# EAGLE board ATA_Wrappot_Fix_V1.0 (EAGLE 4.16)
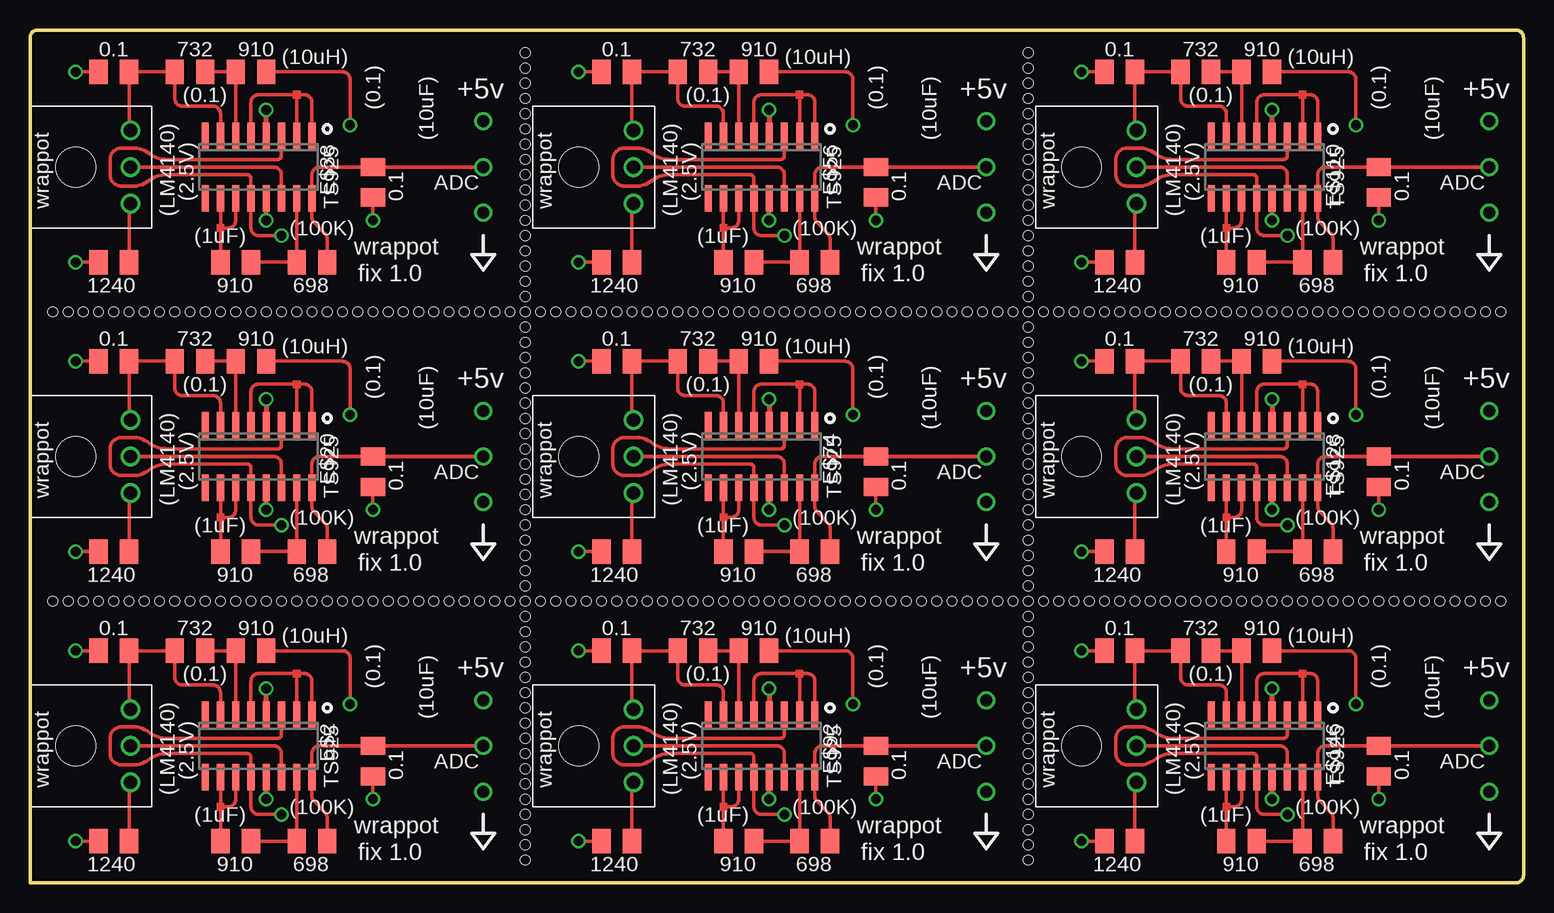
[diagram p0: board, top side]
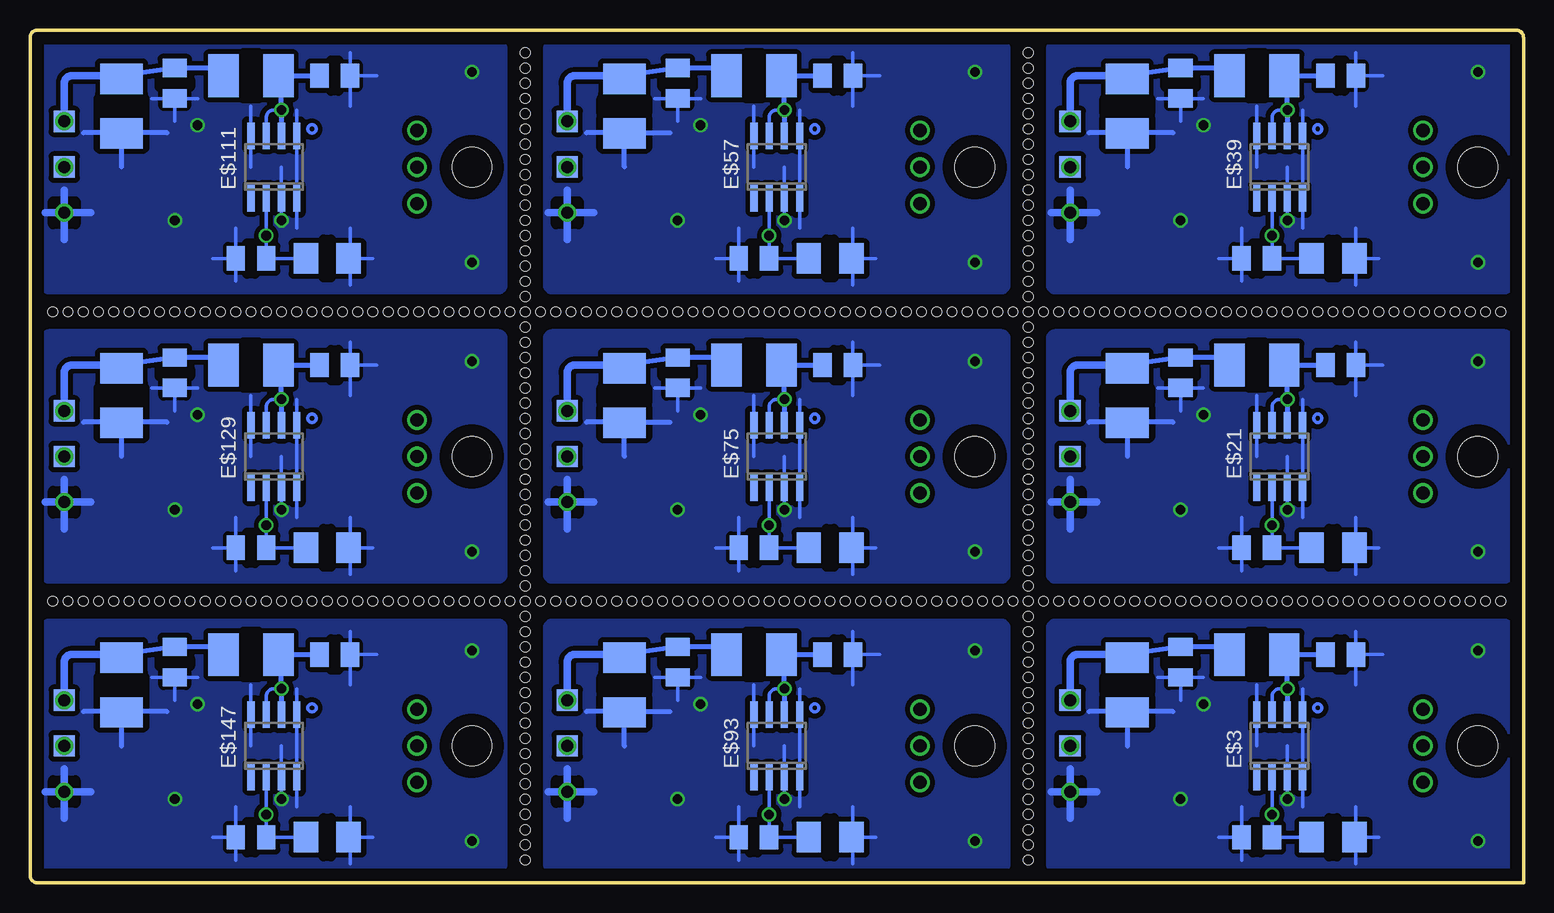
[diagram p1: board, bottom side, seen from below]

Size 124.46 x 71.12 mm. Coordinates in mm from the lower left corner, seen from the top.
Outline: 0,0 123.83,0 arc90 124.46,0.64 124.46,70.48 arc90 123.83,71.12 0.64,71.12 arc90 0,70.48 0,0
Copper layers (1+16): Top 0.035mm / dielectric 1.5mm / Bottom 0.035mm
Design rules "default": minimum track width 10mil, minimum drill 24mil, track to track 8mil, track to pad 8mil, pad to pad 8mil, via to via 8mil, smd to smd 8mil, copper to edge 40mil, drill to drill 8mil, minimum pad ring 10mil, minimum via ring 8mil, stop-mask expansion 4mil, vias tented up to drill 0mil, thermal gap 10mil
Holes 0.8 mm at 1.91,23.5 3.17,23.5 4.45,23.5 5.71,23.5 6.99,23.5 8.26,23.5 9.53,23.5 10.79,23.5 12.06,23.5 13.34,23.5 14.61,23.5 15.88,23.5 17.14,23.5 18.41,23.5 19.68,23.5 20.95,23.5 22.23,23.5 23.5,23.5 24.77,23.5 26.04,23.5 27.3,23.5 28.57,23.5 29.84,23.5 31.11,23.5 32.38,23.5 33.66,23.5 34.92,23.5 36.2,23.5 37.47,23.5 38.73,23.5 40.01,23.5 41.27,23.5 42.55,23.5 43.81,23.5 45.09,23.5 46.35,23.5 47.62,23.5 48.9,23.5 50.16,23.5 51.44,23.5 52.7,23.5 53.98,23.5 55.24,23.5 56.52,23.5 57.78,23.5 59.05,23.5 60.33,23.5 61.59,23.5 62.87,23.5 64.14,23.5 65.41,23.5 66.67,23.5 67.94,23.5 69.22,23.5 70.48,23.5 71.75,23.5 73.03,23.5 74.3,23.5 75.56,23.5 76.83,23.5 78.11,23.5 79.38,23.5 80.64,23.5 81.92,23.5 83.19,23.5 84.45,23.5 85.72,23.5 87,23.5 88.27,23.5 89.53,23.5 90.81,23.5 92.08,23.5 93.34,23.5 94.61,23.5 95.89,23.5 97.16,23.5 98.42,23.5 99.69,23.5 100.97,23.5 102.23,23.5 103.5,23.5 104.78,23.5 106.05,23.5 107.31,23.5 108.58,23.5 109.86,23.5 109.86,23.5 111.12,23.5 112.39,23.5 113.67,23.5 114.94,23.5 116.2,23.5 117.47,23.5 118.75,23.5 120.02,23.5 121.28,23.5 122.56,23.5 1.91,47.62 3.17,47.62 4.45,47.62 5.71,47.62 6.99,47.62 8.26,47.62 9.53,47.62 10.79,47.62 12.06,47.62 13.34,47.62 14.61,47.62 15.88,47.62 17.14,47.62 18.41,47.62 19.68,47.62 20.95,47.62 22.23,47.62 23.5,47.62 24.77,47.62 26.04,47.62 27.3,47.62 28.57,47.62 29.84,47.62 31.11,47.62 32.38,47.62 33.66,47.62 34.92,47.62 36.2,47.62 37.47,47.62 38.73,47.62 40.01,47.62 41.27,47.62 42.55,47.62 43.81,47.62 45.09,47.62 46.35,47.62 47.62,47.62 48.9,47.62 50.16,47.62 51.44,47.62 52.7,47.62 53.98,47.62 55.24,47.62 56.52,47.62 57.78,47.62 59.05,47.62 60.33,47.62 61.59,47.62 62.87,47.62 64.14,47.62 65.41,47.62 66.67,47.62 67.94,47.62 69.22,47.62 70.48,47.62 71.75,47.62 73.03,47.62 74.3,47.62 75.56,47.62 76.83,47.62 78.11,47.62 79.38,47.62 80.64,47.62 81.92,47.62 83.19,47.62 84.45,47.62 85.72,47.62 87,47.62 88.27,47.62 89.53,47.62 90.81,47.62 92.08,47.62 93.34,47.62 94.61,47.62 95.89,47.62 97.16,47.62 98.42,47.62 99.69,47.62 100.97,47.62 102.23,47.62 103.5,47.62 104.78,47.62 106.05,47.62 107.31,47.62 108.58,47.62 109.86,47.62 109.86,47.62 111.12,47.62 112.39,47.62 113.67,47.62 114.94,47.62 116.2,47.62 117.47,47.62 118.75,47.62 120.02,47.62 121.28,47.62 122.56,47.62 41.27,69.22 41.27,67.94 41.27,66.67 41.27,65.41 41.27,64.14 41.27,62.87 41.27,61.59 41.27,60.33 41.27,59.05 41.27,57.78 41.27,56.52 41.27,55.24 41.27,53.98 41.27,52.7 41.27,51.44 41.27,50.16 41.27,48.9 41.27,46.35 41.27,45.09 41.27,43.81 41.27,42.55 41.27,41.27 41.27,40.01 41.27,38.73 41.27,37.47 41.27,36.2 41.27,34.92 41.27,33.66 41.27,32.38 41.27,31.11 41.27,29.84 41.27,28.57 41.27,27.3 41.27,26.04 41.27,24.77 41.27,22.23 41.27,20.95 41.27,19.68 41.27,18.41 41.27,17.14 41.27,15.88 41.27,14.61 41.27,13.34 41.27,12.06 41.27,10.79 41.27,9.53 41.27,8.26 41.27,6.99 41.27,5.71 41.27,4.45 41.27,3.17 41.27,1.91 83.19,69.22 83.19,67.94 83.19,66.67 83.19,65.41 83.19,64.14 83.19,62.87 83.19,61.59 83.19,60.33 83.19,59.05 83.19,57.78 83.19,56.52 83.19,55.24 83.19,53.98 83.19,52.7 83.19,51.44 83.19,50.16 83.19,48.9 83.19,46.35 83.19,45.09 83.19,43.81 83.19,42.55 83.19,41.27 83.19,40.01 83.19,38.73 83.19,37.47 83.19,36.2 83.19,34.92 83.19,33.66 83.19,32.38 83.19,31.11 83.19,29.84 83.19,28.57 83.19,27.3 83.19,26.04 83.19,24.77 83.19,22.23 83.19,20.95 83.19,19.68 83.19,18.41 83.19,17.14 83.19,15.88 83.19,14.61 83.19,13.34 83.19,12.06 83.19,10.79 83.19,9.53 83.19,8.26 83.19,6.99 83.19,5.71 83.19,4.45 83.19,3.17 83.19,1.91
bRestrict: area 36.8,6.7 to 38.7,8.6; area 18.1,13 to 18.7,15.2; area 21.9,13 to 22.5,15.2; area 18.1,7.6 to 18.7,9.8; area 31.1,13 to 34.9,15.6; area 27.6,16.5 to 29.5,17.8; area 13.3,18.1 to 14.6,20; area 22.9,2.9 to 24.1,4.8; area 13,2.5 to 15.2,5.1; area 14.9,17.8 to 15.6,20.3; area 21.6,17.1 to 22.9,21; area 27.3,18.1 to 29.8,18.7; 123 more areas

## Footprints (pad centres in the part's own frame; a part is rotated, then mirrored left to right if it is on the bottom)
MICROFIT1X3PIN = drill 1.1 round: P$1 0,4.572; P$2 -3.048,4.572; P$3 3.048,4.572 | hole 3.302: 0,0
SO16 = smd 0.6 x 2.2: 1 -4.445,-2.6; 2 -3.175,-2.6; 3 -1.905,-2.6; 4 -0.635,-2.6; 5 0.635,-2.6; 6 1.905,-2.6; 7 3.175,-2.6; 8 4.445,-2.6; 9 4.445,2.6; 10 3.175,2.6; 11 1.905,2.6; 12 0.635,2.6; 13 -0.635,2.6; 14 -1.905,2.6; 15 -3.175,2.6; 16 -4.445,2.6
SO8 = smd 0.6 x 2.2: 1 -1.905,-2.6; 2 -0.635,-2.6; 3 0.635,-2.6; 4 1.905,-2.6; 5 1.905,2.6; 6 0.635,2.6; 7 -0.635,2.6; 8 -1.905,2.6
BYPASSPAD = smd 1.778 x 1.778: P$2 0,0
SMD0805 = smd 2.032 x 1.524: P$1 0,1.27; P$2 0,-1.27
CERAMIC10UFSMD = smd 2.032 x 2.54: P$1 1.778,0; P$2 -1.778,0
CAP10UFMIN = smd 2.54 x 3.556: P$1 -2.286,0; P$2 2.286,0

## Placement (x,y rotation side)
E$1  [MICROFIT1X3PIN]  3.81,11.43 270 top
E$2  [SO16]  19.05,11.43 180 top
E$3  [SO8]  20.32,11.43 0 bottom
E$4  [BYPASSPAD]  37.78,15.24 90 bottom
E$5  [SMD0805]  22.23,3.81 90 bottom
E$6  [SMD0805]  6.99,19.37 270 top
E$7  [SMD0805]  6.99,3.49 270 top
E$8  [CERAMIC10UFSMD]  15.88,3.81 0 bottom
E$9  [CAP10UFMIN]  33.02,16.51 90 bottom
E$10  [SMD0805]  18.41,19.37 90 top
E$11  [SMD0805]  13.34,19.37 90 top
E$12  [SMD0805]  23.5,3.49 90 top
E$13  [SMD0805]  17.14,3.49 90 top
E$14  [CAP10UFMIN]  22.23,19.05 180 bottom
E$15  [SMD0805]  15.24,19.05 90 bottom
E$16  [SMD0805]  28.57,18.41 180 bottom
E$17  [SMD0805]  28.57,10.16 0 top
E$18  [BYPASSPAD]  37.78,11.43 90 bottom
E$19  [MICROFIT1X3PIN]  3.81,35.56 270 top
E$20  [SO16]  19.05,35.56 180 top
E$21  [SO8]  20.32,35.56 0 bottom
E$22  [SMD0805]  22.23,27.94 90 bottom
E$23  [CERAMIC10UFSMD]  15.88,27.94 0 bottom
E$24  [CAP10UFMIN]  33.02,40.64 90 bottom
E$25  [SMD0805]  6.99,43.5 270 top
E$26  [SMD0805]  6.99,27.62 270 top
E$27  [SMD0805]  18.41,43.5 90 top
E$28  [SMD0805]  13.34,43.5 90 top
E$29  [SMD0805]  23.5,27.62 90 top
E$30  [SMD0805]  17.14,27.62 90 top
E$31  [CAP10UFMIN]  22.23,43.18 180 bottom
E$32  [SMD0805]  15.24,43.18 90 bottom
E$33  [SMD0805]  28.57,42.55 180 bottom
E$34  [SMD0805]  28.57,34.29 0 top
E$35  [BYPASSPAD]  37.78,39.37 90 bottom
E$36  [BYPASSPAD]  37.78,35.56 90 bottom
E$37  [MICROFIT1X3PIN]  3.81,59.69 270 top
E$38  [SO16]  19.05,59.69 180 top
E$39  [SO8]  20.32,59.69 0 bottom
E$40  [SMD0805]  22.23,52.07 90 bottom
E$41  [CERAMIC10UFSMD]  15.88,52.07 0 bottom
E$42  [CAP10UFMIN]  33.02,64.77 90 bottom
E$43  [SMD0805]  6.99,67.63 270 top
E$44  [SMD0805]  6.99,51.75 270 top
E$45  [SMD0805]  18.41,67.63 90 top
E$46  [SMD0805]  13.34,67.63 90 top
E$47  [SMD0805]  23.5,51.75 90 top
E$48  [SMD0805]  17.14,51.75 90 top
E$49  [CAP10UFMIN]  22.23,67.31 180 bottom
E$50  [SMD0805]  15.24,67.31 90 bottom
E$51  [SMD0805]  28.57,66.67 180 bottom
E$52  [SMD0805]  28.57,58.42 0 top
E$53  [BYPASSPAD]  37.78,63.5 90 bottom
E$54  [BYPASSPAD]  37.78,59.69 90 bottom
E$55  [MICROFIT1X3PIN]  45.72,59.69 270 top
E$56  [SO16]  60.96,59.69 180 top
E$57  [SO8]  62.23,59.69 0 bottom
E$58  [SMD0805]  64.14,52.07 90 bottom
E$59  [CERAMIC10UFSMD]  57.78,52.07 0 bottom
E$60  [CAP10UFMIN]  74.93,64.77 90 bottom
E$61  [SMD0805]  48.9,67.63 270 top
E$62  [SMD0805]  48.9,51.75 270 top
E$63  [SMD0805]  60.33,67.63 90 top
E$64  [SMD0805]  55.24,67.63 90 top
E$65  [SMD0805]  65.41,51.75 90 top
E$66  [SMD0805]  59.05,51.75 90 top
E$67  [CAP10UFMIN]  64.14,67.31 180 bottom
E$68  [SMD0805]  57.15,67.31 90 bottom
E$69  [SMD0805]  70.48,66.67 180 bottom
E$70  [SMD0805]  70.48,58.42 0 top
E$71  [BYPASSPAD]  79.69,63.5 90 bottom
E$72  [BYPASSPAD]  79.69,59.69 90 bottom
E$73  [MICROFIT1X3PIN]  45.72,35.56 270 top
E$74  [SO16]  60.96,35.56 180 top
E$75  [SO8]  62.23,35.56 0 bottom
E$76  [SMD0805]  64.14,27.94 90 bottom
E$77  [CERAMIC10UFSMD]  57.78,27.94 0 bottom
E$78  [CAP10UFMIN]  74.93,40.64 90 bottom
E$79  [SMD0805]  48.9,43.5 270 top
E$80  [SMD0805]  48.9,27.62 270 top
E$81  [SMD0805]  60.33,43.5 90 top
E$82  [SMD0805]  55.24,43.5 90 top
E$83  [SMD0805]  65.41,27.62 90 top
E$84  [SMD0805]  59.05,27.62 90 top
E$85  [CAP10UFMIN]  64.14,43.18 180 bottom
E$86  [SMD0805]  57.15,43.18 90 bottom
E$87  [SMD0805]  70.48,42.55 180 bottom
E$88  [SMD0805]  70.48,34.29 0 top
E$89  [BYPASSPAD]  79.69,39.37 90 bottom
E$90  [BYPASSPAD]  79.69,35.56 90 bottom
E$91  [MICROFIT1X3PIN]  45.72,11.43 270 top
E$92  [SO16]  60.96,11.43 180 top
E$93  [SO8]  62.23,11.43 0 bottom
E$94  [SMD0805]  64.14,3.81 90 bottom
E$95  [CERAMIC10UFSMD]  57.78,3.81 0 bottom
E$96  [CAP10UFMIN]  74.93,16.51 90 bottom
E$97  [SMD0805]  48.9,19.37 270 top
E$98  [SMD0805]  48.9,3.49 270 top
E$99  [SMD0805]  60.33,19.37 90 top
E$100  [SMD0805]  55.24,19.37 90 top
E$101  [SMD0805]  65.41,3.49 90 top
E$102  [SMD0805]  59.05,3.49 90 top
E$103  [CAP10UFMIN]  64.14,19.05 180 bottom
E$104  [SMD0805]  57.15,19.05 90 bottom
E$105  [SMD0805]  70.48,18.41 180 bottom
E$106  [SMD0805]  70.48,10.16 0 top
E$107  [BYPASSPAD]  79.69,15.24 90 bottom
E$108  [BYPASSPAD]  79.69,11.43 90 bottom
E$109  [MICROFIT1X3PIN]  87.63,59.69 270 top
E$110  [SO16]  102.87,59.69 180 top
E$111  [SO8]  104.14,59.69 0 bottom
E$112  [SMD0805]  106.05,52.07 90 bottom
E$113  [CERAMIC10UFSMD]  99.69,52.07 0 bottom
E$114  [CAP10UFMIN]  116.84,64.77 90 bottom
E$115  [SMD0805]  90.81,67.63 270 top
E$116  [SMD0805]  90.81,51.75 270 top
E$117  [SMD0805]  102.23,67.63 90 top
E$118  [SMD0805]  97.16,67.63 90 top
E$119  [SMD0805]  107.31,51.75 90 top
E$120  [SMD0805]  100.97,51.75 90 top
E$121  [CAP10UFMIN]  106.05,67.31 180 bottom
E$122  [SMD0805]  99.06,67.31 90 bottom
E$123  [SMD0805]  112.39,66.67 180 bottom
E$124  [SMD0805]  112.39,58.42 0 top
E$125  [BYPASSPAD]  121.6,63.5 90 bottom
E$126  [BYPASSPAD]  121.6,59.69 90 bottom
E$127  [MICROFIT1X3PIN]  87.63,35.56 270 top
E$128  [SO16]  102.87,35.56 180 top
E$129  [SO8]  104.14,35.56 0 bottom
E$130  [SMD0805]  106.05,27.94 90 bottom
E$131  [CERAMIC10UFSMD]  99.69,27.94 0 bottom
E$132  [CAP10UFMIN]  116.84,40.64 90 bottom
E$133  [SMD0805]  90.81,43.5 270 top
E$134  [SMD0805]  90.81,27.62 270 top
E$135  [SMD0805]  102.23,43.5 90 top
E$136  [SMD0805]  97.16,43.5 90 top
E$137  [SMD0805]  107.31,27.62 90 top
E$138  [SMD0805]  100.97,27.62 90 top
E$139  [CAP10UFMIN]  106.05,43.18 180 bottom
E$140  [SMD0805]  99.06,43.18 90 bottom
E$141  [SMD0805]  112.39,42.55 180 bottom
E$142  [SMD0805]  112.39,34.29 0 top
E$143  [BYPASSPAD]  121.6,39.37 90 bottom
E$144  [BYPASSPAD]  121.6,35.56 90 bottom
E$145  [MICROFIT1X3PIN]  87.63,11.43 270 top
E$146  [SO16]  102.87,11.43 180 top
E$147  [SO8]  104.14,11.43 0 bottom
E$148  [SMD0805]  106.05,3.81 90 bottom
E$149  [CERAMIC10UFSMD]  99.69,3.81 0 bottom
E$150  [CAP10UFMIN]  116.84,16.51 90 bottom
E$151  [SMD0805]  90.81,19.37 270 top
E$152  [SMD0805]  90.81,3.49 270 top
E$153  [SMD0805]  102.23,19.37 90 top
E$154  [SMD0805]  97.16,19.37 90 top
E$155  [SMD0805]  107.31,3.49 90 top
E$156  [SMD0805]  100.97,3.49 90 top
E$157  [CAP10UFMIN]  106.05,19.05 180 bottom
E$158  [SMD0805]  99.06,19.05 90 bottom
E$159  [SMD0805]  112.39,18.41 180 bottom
E$160  [SMD0805]  112.39,10.16 0 top
E$161  [BYPASSPAD]  121.6,15.24 90 bottom
E$162  [BYPASSPAD]  121.6,11.43 90 bottom

## Library data of the parts
E$1 E$4-E$19 E$22-E$37 E$40-E$55 E$58-E$73 E$76-E$91 E$94-E$109 E$112-E$127 E$130-E$145 E$148-E$162 = rfa
E$2 E$3 E$20 E$21 E$38 E$39 E$56 E$57 E$74 E$75 E$92 E$93 E$110 E$111 E$128 E$129 E$146 E$147 = ref-packages

## Nets
GND: E$5.P$1 E$6.P$2 E$7.P$2 E$10.P$2 E$15.P$2 E$16.P$1 E$17.P$2
GND1: E$22.P$1 E$25.P$2 E$26.P$2 E$27.P$2 E$32.P$2 E$33.P$1 E$34.P$2
GND2: E$40.P$1 E$43.P$2 E$44.P$2 E$45.P$2 E$50.P$2 E$51.P$1 E$52.P$2
GND3: E$58.P$1 E$61.P$2 E$62.P$2 E$63.P$2 E$68.P$2 E$69.P$1 E$70.P$2
GND4: E$76.P$1 E$79.P$2 E$80.P$2 E$81.P$2 E$86.P$2 E$87.P$1 E$88.P$2
GND5: E$94.P$1 E$97.P$2 E$98.P$2 E$99.P$2 E$104.P$2 E$105.P$1 E$106.P$2
GND6: E$112.P$1 E$115.P$2 E$116.P$2 E$117.P$2 E$122.P$2 E$123.P$1 E$124.P$2
GND7: E$130.P$1 E$133.P$2 E$134.P$2 E$135.P$2 E$140.P$2 E$141.P$1 E$142.P$2
GND8: E$148.P$1 E$151.P$2 E$152.P$2 E$153.P$2 E$158.P$2 E$159.P$1 E$160.P$2
S$1: E$12.P$2 E$17.P$1
S$2: E$16.P$2
S$3: E$29.P$2 E$34.P$1
S$4: E$12.P$1 E$13.P$2
S$6: E$7.P$1
S$7: E$13.P$1
S$8: E$5.P$2
S$9: E$15.P$1
S$11: E$10.P$1 E$11.P$2
S$12: E$6.P$1 E$11.P$1
S$13: E$33.P$2
S$14: E$29.P$1 E$30.P$2
S$16: E$26.P$1
S$17: E$22.P$2
S$18: E$30.P$1
S$19: E$27.P$1 E$28.P$2
S$20: E$25.P$1 E$28.P$1
S$21: E$32.P$1
S$23: E$47.P$2 E$52.P$1
S$24: E$51.P$2
S$25: E$47.P$1 E$48.P$2
S$27: E$44.P$1
S$28: E$40.P$2
S$29: E$48.P$1
S$30: E$45.P$1 E$46.P$2
S$31: E$43.P$1 E$46.P$1
S$32: E$50.P$1
S$34: E$65.P$2 E$70.P$1
S$35: E$69.P$2
S$36: E$65.P$1 E$66.P$2
S$38: E$62.P$1
S$39: E$58.P$2
S$40: E$66.P$1
S$41: E$63.P$1 E$64.P$2
S$42: E$61.P$1 E$64.P$1
S$43: E$68.P$1
S$45: E$83.P$2 E$88.P$1
S$46: E$87.P$2
S$47: E$83.P$1 E$84.P$2
S$49: E$80.P$1
S$50: E$76.P$2
S$51: E$84.P$1
S$52: E$81.P$1 E$82.P$2
S$53: E$79.P$1 E$82.P$1
S$54: E$86.P$1
S$56: E$101.P$2 E$106.P$1
S$57: E$105.P$2
S$58: E$101.P$1 E$102.P$2
S$60: E$98.P$1
S$61: E$94.P$2
S$62: E$102.P$1
S$63: E$99.P$1 E$100.P$2
S$64: E$97.P$1 E$100.P$1
S$65: E$104.P$1
S$67: E$119.P$2 E$124.P$1
S$68: E$123.P$2
S$69: E$119.P$1 E$120.P$2
S$71: E$116.P$1
S$72: E$112.P$2
S$73: E$120.P$1
S$74: E$117.P$1 E$118.P$2
S$75: E$115.P$1 E$118.P$1
S$76: E$122.P$1
S$78: E$137.P$2 E$142.P$1
S$79: E$141.P$2
S$80: E$137.P$1 E$138.P$2
S$82: E$134.P$1
S$83: E$130.P$2
S$84: E$138.P$1
S$85: E$135.P$1 E$136.P$2
S$86: E$133.P$1 E$136.P$1
S$87: E$140.P$1
S$89: E$155.P$2 E$160.P$1
S$90: E$159.P$2
S$91: E$155.P$1 E$156.P$2
S$93: E$152.P$1
S$94: E$148.P$2
S$95: E$156.P$1
S$96: E$153.P$1 E$154.P$2
S$97: E$151.P$1 E$154.P$1
S$98: E$158.P$1

## Tracks (layer width: path | path; a pad name or v marks a point on that pad's centre or on a via)
GND  (via drill 0.8, 1)
  Top 0.305: v28.57,6.99 E$17.P$2 | v3.81,19.37 E$6.P$2 | v3.81,3.49 E$7.P$2 | E$10.P$2 26.04,19.37 arc-90 26.67,18.73 v26.67,14.92
  Top 0.406: v19.68,6.99 19.68,8.89
  Bottom 0.305: 22.23,11.43 22.23,16.51 | 18.41,6.35 18.41,16.19 | v19.68,6.99 19.68,11.43 | E$15.P$2 13.97,20.95 | E$15.P$2 11.75,19.05 | 13.97,16.51 E$15.P$2 | 26.67,17.14 E$16.P$1 | E$16.P$1 30.48,17.14 | E$16.P$1 28.57,15.24 | 13.97,3.81 13.97,6.35 | 13.97,3.81 12.06,3.81 | 13.97,1.59 13.97,3.81 | E$5.P$1 23.5,6.35 | E$5.P$1 25.4,3.81 | 23.5,1.91 E$5.P$1
  Bottom 0.406: 29.21,14.29 33.02,14.29 | 33.02,14.29 33.02,11.43 | 33.02,14.29 36.2,14.29
  Bottom 0.61: v37.78,7.62 35.56,7.62 | 37.78,5.4 v37.78,7.62 | v37.78,7.62 37.78,9.53 | v37.78,7.62 39.37,7.62
  pour Bottom (isolate 0.406): 0.95,1.59 0.95,21.27 arc-90 1.59,21.91 39.05,21.91 arc-90 39.69,21.27 39.69,1.59 arc-90 39.05,0.95 1.59,0.95 arc-90
GND1  (via drill 0.8, 1)
  Top 0.305: v28.57,31.11 E$34.P$2 | v3.81,43.5 E$25.P$2 | v3.81,27.62 E$26.P$2 | E$27.P$2 26.04,43.5 arc-90 26.67,42.86 v26.67,39.05
  Top 0.406: v19.68,31.11 19.68,33.02
  Bottom 0.305: 22.23,35.56 22.23,40.64 | 18.41,30.48 18.41,40.32 | v19.68,31.11 19.68,35.56 | E$32.P$2 13.97,45.09 | E$32.P$2 11.75,43.18 | 13.97,40.64 E$32.P$2 | E$33.P$1 26.67,41.27 | E$33.P$1 30.48,41.27 | 28.57,39.37 E$33.P$1 | 13.97,27.94 13.97,30.48 | 13.97,27.94 12.06,27.94 | 13.97,25.72 13.97,27.94 | E$22.P$1 23.5,30.48 | E$22.P$1 25.4,27.94 | 23.5,26.04 E$22.P$1
  Bottom 0.406: 29.21,38.42 33.02,38.42 | 33.02,38.42 33.02,35.56 | 33.02,38.42 36.2,38.42
  Bottom 0.61: v37.78,31.75 35.56,31.75 | 37.78,29.53 v37.78,31.75 | v37.78,31.75 37.78,33.66 | v37.78,31.75 39.37,31.75
  pour Bottom (isolate 0.406): 0.95,25.72 0.95,45.4 arc-90 1.59,46.04 39.05,46.04 arc-90 39.69,45.4 39.69,25.72 arc-90 39.05,25.08 1.59,25.08 arc-90
GND2  (via drill 0.8, 1)
  Top 0.305: v28.57,55.24 E$52.P$2 | v3.81,67.63 E$43.P$2 | v3.81,51.75 E$44.P$2 | E$45.P$2 26.04,67.63 arc-90 26.67,66.99 v26.67,63.18
  Top 0.406: v19.68,55.24 19.68,57.15
  Bottom 0.305: 22.23,59.69 22.23,64.77 | 18.41,54.61 18.41,64.45 | v19.68,55.24 19.68,59.69 | E$50.P$2 13.97,69.22 | E$50.P$2 11.75,67.31 | 13.97,64.77 E$50.P$2 | 26.67,65.41 E$51.P$1 | E$51.P$1 30.48,65.41 | E$51.P$1 28.57,63.5 | 13.97,52.07 13.97,54.61 | 13.97,52.07 12.06,52.07 | 13.97,49.85 13.97,52.07 | E$40.P$1 23.5,54.61 | E$40.P$1 25.4,52.07 | 23.5,50.16 E$40.P$1
  Bottom 0.406: 29.21,62.55 33.02,62.55 | 33.02,62.55 33.02,59.69 | 33.02,62.55 36.2,62.55
  Bottom 0.61: v37.78,55.88 35.56,55.88 | 37.78,53.66 v37.78,55.88 | v37.78,55.88 37.78,57.78 | v37.78,55.88 39.37,55.88
  pour Bottom (isolate 0.406): 0.95,49.85 0.95,69.53 arc-90 1.59,70.17 39.05,70.17 arc-90 39.69,69.53 39.69,49.85 arc-90 39.05,49.21 1.59,49.21 arc-90
GND3  (via drill 0.8, 1)
  Top 0.305: v70.48,55.24 E$70.P$2 | E$61.P$2 v45.72,67.63 | E$62.P$2 v45.72,51.75 | E$63.P$2 67.94,67.63 arc-90 68.58,66.99 v68.58,63.18
  Top 0.406: v61.59,55.24 61.59,57.15
  Bottom 0.305: 64.14,59.69 64.14,64.77 | 60.33,54.61 60.33,64.45 | v61.59,55.24 61.59,59.69 | E$68.P$2 55.88,69.22 | E$68.P$2 53.66,67.31 | 55.88,64.77 E$68.P$2 | E$69.P$1 68.58,65.41 | E$69.P$1 72.39,65.41 | E$69.P$1 70.48,63.5 | 55.88,52.07 55.88,54.61 | 55.88,52.07 53.98,52.07 | 55.88,49.85 55.88,52.07 | E$58.P$1 65.41,54.61 | E$58.P$1 67.31,52.07 | 65.41,50.16 E$58.P$1
  Bottom 0.406: 74.93,62.55 71.12,62.55 | 74.93,59.69 74.93,62.55 | 74.93,62.55 78.11,62.55
  Bottom 0.61: v79.69,55.88 77.47,55.88 | 79.69,53.66 v79.69,55.88 | v79.69,55.88 79.69,57.78 | v79.69,55.88 81.28,55.88
  pour Bottom (isolate 0.406): 42.86,49.85 42.86,69.53 arc-90 43.5,70.17 80.96,70.17 arc-90 81.6,69.53 81.6,49.85 arc-90 80.96,49.21 43.5,49.21 arc-90
GND4  (via drill 0.8, 1)
  Top 0.305: v70.48,31.11 E$88.P$2 | E$79.P$2 v45.72,43.5 | E$80.P$2 v45.72,27.62 | E$81.P$2 67.94,43.5 arc-90 68.58,42.86 v68.58,39.05
  Top 0.406: v61.59,31.11 61.59,33.02
  Bottom 0.305: 64.14,35.56 64.14,40.64 | 60.33,30.48 60.33,40.32 | v61.59,31.11 61.59,35.56 | E$86.P$2 55.88,45.09 | E$86.P$2 53.66,43.18 | 55.88,40.64 E$86.P$2 | E$87.P$1 68.58,41.27 | E$87.P$1 72.39,41.27 | 70.48,39.37 E$87.P$1 | 55.88,27.94 55.88,30.48 | 55.88,27.94 53.98,27.94 | 55.88,25.72 55.88,27.94 | E$76.P$1 65.41,30.48 | E$76.P$1 67.31,27.94 | 65.41,26.04 E$76.P$1
  Bottom 0.406: 74.93,38.42 71.12,38.42 | 74.93,35.56 74.93,38.42 | 74.93,38.42 78.11,38.42
  Bottom 0.61: v79.69,31.75 77.47,31.75 | 79.69,29.53 v79.69,31.75 | v79.69,31.75 79.69,33.66 | v79.69,31.75 81.28,31.75
  pour Bottom (isolate 0.406): 42.86,25.72 42.86,45.4 arc-90 43.5,46.04 80.96,46.04 arc-90 81.6,45.4 81.6,25.72 arc-90 80.96,25.08 43.5,25.08 arc-90
GND5  (via drill 0.8, 1)
  Top 0.305: v70.48,6.99 E$106.P$2 | E$97.P$2 v45.72,19.37 | E$98.P$2 v45.72,3.49 | E$99.P$2 67.94,19.37 arc-90 68.58,18.73 v68.58,14.92
  Top 0.406: v61.59,6.99 61.59,8.89
  Bottom 0.305: 64.14,11.43 64.14,16.51 | 60.33,6.35 60.33,16.19 | v61.59,6.99 61.59,11.43 | E$104.P$2 55.88,20.95 | E$104.P$2 53.66,19.05 | 55.88,16.51 E$104.P$2 | E$105.P$1 68.58,17.14 | E$105.P$1 72.39,17.14 | E$105.P$1 70.48,15.24 | 55.88,3.81 55.88,6.35 | 55.88,3.81 53.98,3.81 | 55.88,1.59 55.88,3.81 | E$94.P$1 65.41,6.35 | E$94.P$1 67.31,3.81 | 65.41,1.91 E$94.P$1
  Bottom 0.406: 74.93,14.29 71.12,14.29 | 74.93,11.43 74.93,14.29 | 74.93,14.29 78.11,14.29
  Bottom 0.61: v79.69,7.62 77.47,7.62 | 79.69,5.4 v79.69,7.62 | v79.69,7.62 79.69,9.53 | v79.69,7.62 81.28,7.62
  pour Bottom (isolate 0.406): 42.86,1.59 42.86,21.27 arc-90 43.5,21.91 80.96,21.91 arc-90 81.6,21.27 81.6,1.59 arc-90 80.96,0.95 43.5,0.95 arc-90
GND6  (via drill 0.8, 1)
  Top 0.305: v112.39,55.24 E$124.P$2 | v87.63,67.63 E$115.P$2 | v87.63,51.75 E$116.P$2 | E$117.P$2 109.86,67.63 arc-90 110.49,66.99 v110.49,63.18
  Top 0.406: v103.5,55.24 103.5,57.15
  Bottom 0.305: 106.05,59.69 106.05,64.77 | 102.23,54.61 102.23,64.45 | v103.5,55.24 103.5,59.69 | E$122.P$2 97.79,69.22 | E$122.P$2 95.57,67.31 | 97.79,64.77 E$122.P$2 | 110.49,65.41 E$123.P$1 | E$123.P$1 114.3,65.41 | E$123.P$1 112.39,63.5 | 97.79,52.07 97.79,54.61 | 97.79,52.07 95.89,52.07 | 97.79,49.85 97.79,52.07 | E$112.P$1 107.31,54.61 | E$112.P$1 109.22,52.07 | 107.31,50.16 E$112.P$1
  Bottom 0.406: 113.03,62.55 116.84,62.55 | 116.84,62.55 116.84,59.69 | 116.84,62.55 120.02,62.55
  Bottom 0.61: v121.6,55.88 119.38,55.88 | 121.6,53.66 v121.6,55.88 | v121.6,55.88 121.6,57.78 | v121.6,55.88 123.19,55.88
  pour Bottom (isolate 0.406): 84.77,49.85 84.77,69.53 arc-90 85.41,70.17 122.87,70.17 arc-90 123.51,69.53 123.51,49.85 arc-90 122.87,49.21 85.41,49.21 arc-90
GND7  (via drill 0.8, 1)
  Top 0.305: v112.39,31.11 E$142.P$2 | v87.63,43.5 E$133.P$2 | v87.63,27.62 E$134.P$2 | E$135.P$2 109.86,43.5 arc-90 110.49,42.86 v110.49,39.05
  Top 0.406: v103.5,31.11 103.5,33.02
  Bottom 0.305: 106.05,35.56 106.05,40.64 | 102.23,30.48 102.23,40.32 | v103.5,31.11 103.5,35.56 | E$140.P$2 97.79,45.09 | E$140.P$2 95.57,43.18 | 97.79,40.64 E$140.P$2 | E$141.P$1 110.49,41.27 | E$141.P$1 114.3,41.27 | 112.39,39.37 E$141.P$1 | 97.79,27.94 97.79,30.48 | 97.79,27.94 95.89,27.94 | 97.79,25.72 97.79,27.94 | E$130.P$1 107.31,30.48 | E$130.P$1 109.22,27.94 | 107.31,26.04 E$130.P$1
  Bottom 0.406: 113.03,38.42 116.84,38.42 | 116.84,38.42 116.84,35.56 | 116.84,38.42 120.02,38.42
  Bottom 0.61: v121.6,31.75 119.38,31.75 | 121.6,29.53 v121.6,31.75 | v121.6,31.75 121.6,33.66 | v121.6,31.75 123.19,31.75
  pour Bottom (isolate 0.406): 84.77,25.72 84.77,45.4 arc-90 85.41,46.04 122.87,46.04 arc-90 123.51,45.4 123.51,25.72 arc-90 122.87,25.08 85.41,25.08 arc-90
GND8  (via drill 0.8, 1)
  Top 0.305: v112.39,6.99 E$160.P$2 | v87.63,19.37 E$151.P$2 | v87.63,3.49 E$152.P$2 | E$153.P$2 109.86,19.37 arc-90 110.49,18.73 v110.49,14.92
  Top 0.406: v103.5,6.99 103.5,8.89
  Bottom 0.305: 106.05,11.43 106.05,16.51 | 102.23,6.35 102.23,16.19 | v103.5,6.99 103.5,11.43 | E$158.P$2 97.79,20.95 | E$158.P$2 95.57,19.05 | 97.79,16.51 E$158.P$2 | 110.49,17.14 E$159.P$1 | E$159.P$1 114.3,17.14 | E$159.P$1 112.39,15.24 | 97.79,3.81 97.79,6.35 | 97.79,3.81 95.89,3.81 | 97.79,1.59 97.79,3.81 | E$148.P$1 107.31,6.35 | E$148.P$1 109.22,3.81 | 107.31,1.91 E$148.P$1
  Bottom 0.406: 113.03,14.29 116.84,14.29 | 116.84,14.29 116.84,11.43 | 116.84,14.29 120.02,14.29
  Bottom 0.61: v121.6,7.62 119.38,7.62 | 121.6,5.4 v121.6,7.62 | v121.6,7.62 121.6,9.53 | v121.6,7.62 123.19,7.62
  pour Bottom (isolate 0.406): 84.77,1.59 84.77,21.27 arc-90 85.41,21.91 122.87,21.91 arc-90 123.51,21.27 123.51,1.59 arc-90 122.87,0.95 85.41,0.95 arc-90
S$1  (via drill 1)
  Top 0.305: v37.78,11.43 E$17.P$1 24.13,11.43 arc90 23.5,10.79 23.5,7.25 arc45 23.68,6.8 24.58,5.9 arc-45 24.77,5.45 E$12.P$2
S$2  (via drill 1)
  Bottom 0.406: 33.02,19.05 E$16.P$2 24.13,19.68
  Bottom 0.61: v37.78,15.24 37.78,18.41 arc90 37.15,19.05 33.02,19.05
S$3  (via drill 1)
  Top 0.305: v37.78,35.56 E$34.P$1 24.13,35.56 arc90 23.5,34.92 23.5,31.38 arc45 23.68,30.93 24.58,30.03 arc-45 24.77,29.58 E$29.P$2
S$4
  Top 0.305: 22.23,8.89 E$12.P$1 E$13.P$2
S$5
  Top 0.305: 8.26,11.43 20.32,11.43 arc-90 20.95,10.79 20.95,8.89
S$6
  Top 0.305: E$7.P$1 8.26,8.26
S$7
  Top 0.305: 15.88,6.35 15.88,8.89 | E$13.P$1 15.88,6.35 | 17.14,8.89 17.14,6.99 arc-90 16.51,6.35 15.88,6.35
S$8  (via drill 0.8)
  Top 0.305: 20.95,13.97 20.95,12.38 arc-90 20.64,12.06 11.43,12.06 arc-28 10.16,12.38 arc28 8.89,13.02 7.62,13.02 arc90 6.67,12.06 6.67,10.79 arc90 7.62,9.84 8.89,9.84 arc28 10.16,10.48 arc-28 11.43,10.79 18.1,10.79 arc-90 18.41,10.48 18.41,6.35 arc90 19.05,5.71 v20.95,5.71
  Bottom 0.305: 20.95,8.89 v20.95,5.71 E$5.P$2 17.78,3.81
S$9  (via drill 0.8)
  Top 0.406: 19.68,13.97 v19.68,16.19
  Bottom 0.305: 20.95,13.97 20.95,15.56 arc90 20.32,16.19 v19.68,16.19
  Bottom 0.406: 19.68,19.05 E$15.P$1 | 19.68,19.05 20.32,19.05 | 19.68,13.97 v19.68,16.19 19.68,19.05
S$10
  Top 0.305: 18.41,13.97 18.41,16.83 arc-90 19.05,17.46 22.23,17.46 | 22.23,17.46 22.86,17.46 arc-90 23.5,16.83 23.5,13.97 | 22.23,17.46 22.23,13.97
S$11
  Top 0.305: 17.14,13.97 E$10.P$1 E$11.P$2
S$12
  Top 0.305: 15.88,13.97 15.88,15.88 arc90 15.24,16.51 12.7,16.51 arc-90 12.06,17.14 E$11.P$1 E$6.P$1 8.26,14.61
S$13  (via drill 1)
  Bottom 0.406: 33.02,43.18 E$33.P$2 24.13,43.81
  Bottom 0.61: v37.78,39.37 37.78,42.55 arc90 37.15,43.18 33.02,43.18
S$14
  Top 0.305: 22.23,33.02 E$29.P$1 E$30.P$2
S$15
  Top 0.305: 8.26,35.56 20.32,35.56 arc-90 20.95,34.92 20.95,33.02
S$16
  Top 0.305: E$26.P$1 8.26,32.38
S$17  (via drill 0.8)
  Top 0.305: 20.95,38.1 20.95,36.51 arc-90 20.64,36.2 11.43,36.2 arc-28 10.16,36.51 arc28 8.89,37.15 7.62,37.15 arc90 6.67,36.2 6.67,34.92 arc90 7.62,33.97 8.89,33.97 arc28 10.16,34.61 arc-28 11.43,34.92 18.1,34.92 arc-90 18.41,34.61 18.41,30.48 arc90 19.05,29.84 v20.95,29.84
  Bottom 0.305: 20.95,33.02 v20.95,29.84 E$22.P$2 17.78,27.94
S$18
  Top 0.305: 15.88,30.48 15.88,33.02 | E$30.P$1 15.88,30.48 | 17.14,33.02 17.14,31.11 arc-90 16.51,30.48 15.88,30.48
S$19
  Top 0.305: 17.14,38.1 E$27.P$1 E$28.P$2
S$20
  Top 0.305: 15.88,38.1 15.88,40.01 arc90 15.24,40.64 12.7,40.64 arc-90 12.06,41.27 E$28.P$1 E$25.P$1 8.26,38.73
S$21  (via drill 0.8)
  Top 0.406: v19.68,40.32 19.68,38.1
  Bottom 0.305: 20.95,38.1 20.95,39.69 arc90 20.32,40.32 v19.68,40.32
  Bottom 0.406: 19.68,43.18 E$32.P$1 | 19.68,43.18 20.32,43.18 | 19.68,38.1 v19.68,40.32 19.68,43.18
S$22
  Top 0.305: 18.41,38.1 18.41,40.96 arc-90 19.05,41.59 22.23,41.59 | 22.23,41.59 22.86,41.59 arc-90 23.5,40.96 23.5,38.1 | 22.23,41.59 22.23,38.1
S$23  (via drill 1)
  Top 0.305: v37.78,59.69 E$52.P$1 24.13,59.69 arc90 23.5,59.05 23.5,55.51 arc45 23.68,55.06 24.58,54.16 arc-45 24.77,53.71 E$47.P$2
S$24  (via drill 1)
  Bottom 0.406: 33.02,67.31 E$51.P$2 24.13,67.94
  Bottom 0.61: v37.78,63.5 37.78,66.67 arc90 37.15,67.31 33.02,67.31
S$25
  Top 0.305: 22.23,57.15 E$47.P$1 E$48.P$2
S$26
  Top 0.305: 8.26,59.69 20.32,59.69 arc-90 20.95,59.05 20.95,57.15
S$27
  Top 0.305: E$44.P$1 8.26,56.52
S$28  (via drill 0.8)
  Top 0.305: 20.95,62.23 20.95,60.64 arc-90 20.64,60.33 11.43,60.33 arc-28 10.16,60.64 arc28 8.89,61.28 7.62,61.28 arc90 6.67,60.33 6.67,59.05 arc90 7.62,58.1 8.89,58.1 arc28 10.16,58.74 arc-28 11.43,59.05 18.1,59.05 arc-90 18.41,58.74 18.41,54.61 arc90 19.05,53.98 v20.95,53.98
  Bottom 0.305: 20.95,57.15 v20.95,53.98 E$40.P$2 17.78,52.07
S$29
  Top 0.305: 15.88,54.61 15.88,57.15 | E$48.P$1 15.88,54.61 | 17.14,57.15 17.14,55.24 arc-90 16.51,54.61 15.88,54.61
S$30
  Top 0.305: 17.14,62.23 E$45.P$1 E$46.P$2
S$31
  Top 0.305: 15.88,62.23 15.88,64.14 arc90 15.24,64.77 12.7,64.77 arc-90 12.06,65.41 E$46.P$1 E$43.P$1 8.26,62.87
S$32  (via drill 0.8)
  Top 0.406: 19.68,62.23 v19.68,64.45
  Bottom 0.305: 20.95,62.23 20.95,63.82 arc90 20.32,64.45 v19.68,64.45
  Bottom 0.406: 19.68,67.31 E$50.P$1 | 19.68,67.31 20.32,67.31 | 19.68,62.23 v19.68,64.45 19.68,67.31
S$33
  Top 0.305: 18.41,62.23 18.41,65.09 arc-90 19.05,65.72 22.23,65.72 | 22.23,65.72 22.86,65.72 arc-90 23.5,65.09 23.5,62.23 | 22.23,65.72 22.23,62.23
S$34  (via drill 1)
  Top 0.305: v79.69,59.69 E$70.P$1 66.04,59.69 arc90 65.41,59.05 65.41,55.51 arc45 65.59,55.06 66.49,54.16 arc-45 66.67,53.71 E$65.P$2
S$35  (via drill 1)
  Bottom 0.406: 74.93,67.31 E$69.P$2 66.04,67.94
  Bottom 0.61: v79.69,63.5 79.69,66.67 arc90 79.06,67.31 74.93,67.31
S$36
  Top 0.305: 64.14,57.15 E$65.P$1 E$66.P$2
S$37
  Top 0.305: 50.16,59.69 62.23,59.69 arc-90 62.87,59.05 62.87,57.15
S$38
  Top 0.305: E$62.P$1 50.16,56.52
S$39  (via drill 0.8)
  Top 0.305: 62.87,62.23 62.87,60.64 arc-90 62.55,60.33 53.34,60.33 arc-28 52.07,60.64 arc28 50.8,61.28 49.53,61.28 arc90 48.58,60.33 48.58,59.05 arc90 49.53,58.1 50.8,58.1 arc28 52.07,58.74 arc-28 53.34,59.05 60.01,59.05 arc-90 60.33,58.74 60.33,54.61 arc90 60.96,53.98 v62.87,53.98
  Bottom 0.305: 62.87,57.15 v62.87,53.98 E$58.P$2 59.69,52.07
S$40
  Top 0.305: 57.78,54.61 57.78,57.15 | E$66.P$1 57.78,54.61 | 59.05,57.15 59.05,55.24 arc-90 58.42,54.61 57.78,54.61
S$41
  Top 0.305: 59.05,62.23 E$63.P$1 E$64.P$2
S$42
  Top 0.305: 57.78,62.23 57.78,64.14 arc90 57.15,64.77 54.61,64.77 arc-90 53.98,65.41 E$64.P$1 E$61.P$1 50.16,62.87
S$43  (via drill 0.8)
  Top 0.406: v61.59,64.45 61.59,62.23
  Bottom 0.305: 62.87,62.23 62.87,63.82 arc90 62.23,64.45 v61.59,64.45
  Bottom 0.406: 61.59,67.31 E$68.P$1 | 61.59,67.31 62.23,67.31 | 61.59,62.23 v61.59,64.45 61.59,67.31
S$44
  Top 0.305: 60.33,62.23 60.33,65.09 arc-90 60.96,65.72 64.14,65.72 | 64.14,65.72 64.77,65.72 arc-90 65.41,65.09 65.41,62.23 | 64.14,65.72 64.14,62.23
S$45  (via drill 1)
  Top 0.305: v79.69,35.56 E$88.P$1 66.04,35.56 arc90 65.41,34.92 65.41,31.38 arc45 65.59,30.93 66.49,30.03 arc-45 66.67,29.58 E$83.P$2
S$46  (via drill 1)
  Bottom 0.406: 74.93,43.18 E$87.P$2 66.04,43.81
  Bottom 0.61: v79.69,39.37 79.69,42.55 arc90 79.06,43.18 74.93,43.18
S$47
  Top 0.305: 64.14,33.02 E$83.P$1 E$84.P$2
S$48
  Top 0.305: 50.16,35.56 62.23,35.56 arc-90 62.87,34.92 62.87,33.02
S$49
  Top 0.305: E$80.P$1 50.16,32.38
S$50  (via drill 0.8)
  Top 0.305: 62.87,38.1 62.87,36.51 arc-90 62.55,36.2 53.34,36.2 arc-28 52.07,36.51 arc28 50.8,37.15 49.53,37.15 arc90 48.58,36.2 48.58,34.92 arc90 49.53,33.97 50.8,33.97 arc28 52.07,34.61 arc-28 53.34,34.92 60.01,34.92 arc-90 60.33,34.61 60.33,30.48 arc90 60.96,29.84 v62.87,29.84
  Bottom 0.305: 62.87,33.02 v62.87,29.84 E$76.P$2 59.69,27.94
S$51
  Top 0.305: 57.78,30.48 57.78,33.02 | E$84.P$1 57.78,30.48 | 59.05,33.02 59.05,31.11 arc-90 58.42,30.48 57.78,30.48
S$52
  Top 0.305: 59.05,38.1 E$81.P$1 E$82.P$2
S$53
  Top 0.305: 57.78,38.1 57.78,40.01 arc90 57.15,40.64 54.61,40.64 arc-90 53.98,41.27 E$82.P$1 E$79.P$1 50.16,38.73
S$54  (via drill 0.8)
  Top 0.406: v61.59,40.32 61.59,38.1
  Bottom 0.305: 62.87,38.1 62.87,39.69 arc90 62.23,40.32 v61.59,40.32
  Bottom 0.406: 61.59,43.18 E$86.P$1 | 61.59,43.18 62.23,43.18 | 61.59,38.1 v61.59,40.32 61.59,43.18
S$55
  Top 0.305: 60.33,38.1 60.33,40.96 arc-90 60.96,41.59 64.14,41.59 | 64.14,41.59 64.77,41.59 arc-90 65.41,40.96 65.41,38.1 | 64.14,41.59 64.14,38.1
S$56  (via drill 1)
  Top 0.305: v79.69,11.43 E$106.P$1 66.04,11.43 arc90 65.41,10.79 65.41,7.25 arc45 65.59,6.8 66.49,5.9 arc-45 66.67,5.45 E$101.P$2
S$57  (via drill 1)
  Bottom 0.406: 74.93,19.05 E$105.P$2 66.04,19.68
  Bottom 0.61: v79.69,15.24 79.69,18.41 arc90 79.06,19.05 74.93,19.05
S$58
  Top 0.305: 64.14,8.89 E$101.P$1 E$102.P$2
S$59
  Top 0.305: 50.16,11.43 62.23,11.43 arc-90 62.87,10.79 62.87,8.89
S$60
  Top 0.305: E$98.P$1 50.16,8.26
S$61  (via drill 0.8)
  Top 0.305: 62.87,13.97 62.87,12.38 arc-90 62.55,12.06 53.34,12.06 arc-28 52.07,12.38 arc28 50.8,13.02 49.53,13.02 arc90 48.58,12.06 48.58,10.79 arc90 49.53,9.84 50.8,9.84 arc28 52.07,10.48 arc-28 53.34,10.79 60.01,10.79 arc-90 60.33,10.48 60.33,6.35 arc90 60.96,5.71 v62.87,5.71
  Bottom 0.305: 62.87,8.89 v62.87,5.71 E$94.P$2 59.69,3.81
S$62
  Top 0.305: 57.78,6.35 57.78,8.89 | E$102.P$1 57.78,6.35 | 59.05,8.89 59.05,6.99 arc-90 58.42,6.35 57.78,6.35
S$63
  Top 0.305: 59.05,13.97 E$99.P$1 E$100.P$2
S$64
  Top 0.305: 57.78,13.97 57.78,15.88 arc90 57.15,16.51 54.61,16.51 arc-90 53.98,17.14 E$100.P$1 E$97.P$1 50.16,14.61
S$65  (via drill 0.8)
  Top 0.406: v61.59,16.19 61.59,13.97
  Bottom 0.305: 62.87,13.97 62.87,15.56 arc90 62.23,16.19 v61.59,16.19
  Bottom 0.406: 61.59,19.05 E$104.P$1 | 61.59,19.05 62.23,19.05 | 61.59,13.97 v61.59,16.19 61.59,19.05
S$66
  Top 0.305: 60.33,13.97 60.33,16.83 arc-90 60.96,17.46 64.14,17.46 | 64.14,17.46 64.77,17.46 arc-90 65.41,16.83 65.41,13.97 | 64.14,17.46 64.14,13.97
S$67  (via drill 1)
  Top 0.305: v121.6,59.69 E$124.P$1 107.95,59.69 arc90 107.31,59.05 107.31,55.51 arc45 107.5,55.06 108.4,54.16 arc-45 108.58,53.71 E$119.P$2
S$68  (via drill 1)
  Bottom 0.406: 116.84,67.31 E$123.P$2 107.95,67.94
  Bottom 0.61: v121.6,63.5 121.6,66.67 arc90 120.97,67.31 116.84,67.31
S$69
  Top 0.305: 106.05,57.15 E$119.P$1 E$120.P$2
S$70
  Top 0.305: 92.08,59.69 104.14,59.69 arc-90 104.78,59.05 104.78,57.15
S$71
  Top 0.305: E$116.P$1 92.08,56.52
S$72  (via drill 0.8)
  Top 0.305: 104.78,62.23 104.78,60.64 arc-90 104.46,60.33 95.25,60.33 arc-28 93.98,60.64 arc28 92.71,61.28 91.44,61.28 arc90 90.49,60.33 90.49,59.05 arc90 91.44,58.1 92.71,58.1 arc28 93.98,58.74 arc-28 95.25,59.05 101.92,59.05 arc-90 102.23,58.74 102.23,54.61 arc90 102.87,53.98 v104.78,53.98
  Bottom 0.305: 104.78,57.15 v104.78,53.98 E$112.P$2 101.6,52.07
S$73
  Top 0.305: 99.69,54.61 99.69,57.15 | E$120.P$1 99.69,54.61 | 100.97,57.15 100.97,55.24 arc-90 100.33,54.61 99.69,54.61
S$74
  Top 0.305: 100.97,62.23 E$117.P$1 E$118.P$2
S$75
  Top 0.305: 99.69,62.23 99.69,64.14 arc90 99.06,64.77 96.52,64.77 arc-90 95.89,65.41 E$118.P$1 E$115.P$1 92.08,62.87
S$76  (via drill 0.8)
  Top 0.406: 103.5,62.23 v103.5,64.45
  Bottom 0.305: 104.78,62.23 104.78,63.82 arc90 104.14,64.45 v103.5,64.45
  Bottom 0.406: 103.5,67.31 E$122.P$1 | 103.5,67.31 104.14,67.31 | 103.5,62.23 v103.5,64.45 103.5,67.31
S$77
  Top 0.305: 102.23,62.23 102.23,65.09 arc-90 102.87,65.72 106.05,65.72 | 106.05,65.72 106.68,65.72 arc-90 107.31,65.09 107.31,62.23 | 106.05,65.72 106.05,62.23
S$78  (via drill 1)
  Top 0.305: v121.6,35.56 E$142.P$1 107.95,35.56 arc90 107.31,34.92 107.31,31.38 arc45 107.5,30.93 108.4,30.03 arc-45 108.58,29.58 E$137.P$2
S$79  (via drill 1)
  Bottom 0.406: 116.84,43.18 E$141.P$2 107.95,43.81
  Bottom 0.61: v121.6,39.37 121.6,42.55 arc90 120.97,43.18 116.84,43.18
S$80
  Top 0.305: 106.05,33.02 E$137.P$1 E$138.P$2
S$81
  Top 0.305: 92.08,35.56 104.14,35.56 arc-90 104.78,34.92 104.78,33.02
S$82
  Top 0.305: E$134.P$1 92.08,32.38
S$83  (via drill 0.8)
  Top 0.305: 104.78,38.1 104.78,36.51 arc-90 104.46,36.2 95.25,36.2 arc-28 93.98,36.51 arc28 92.71,37.15 91.44,37.15 arc90 90.49,36.2 90.49,34.92 arc90 91.44,33.97 92.71,33.97 arc28 93.98,34.61 arc-28 95.25,34.92 101.92,34.92 arc-90 102.23,34.61 102.23,30.48 arc90 102.87,29.84 v104.78,29.84
  Bottom 0.305: 104.78,33.02 v104.78,29.84 E$130.P$2 101.6,27.94
S$84
  Top 0.305: 99.69,30.48 99.69,33.02 | E$138.P$1 99.69,30.48 | 100.97,33.02 100.97,31.11 arc-90 100.33,30.48 99.69,30.48
S$85
  Top 0.305: 100.97,38.1 E$135.P$1 E$136.P$2
S$86
  Top 0.305: 99.69,38.1 99.69,40.01 arc90 99.06,40.64 96.52,40.64 arc-90 95.89,41.27 E$136.P$1 E$133.P$1 92.08,38.73
S$87  (via drill 0.8)
  Top 0.406: v103.5,40.32 103.5,38.1
  Bottom 0.305: 104.78,38.1 104.78,39.69 arc90 104.14,40.32 v103.5,40.32
  Bottom 0.406: 103.5,43.18 E$140.P$1 | 103.5,43.18 104.14,43.18 | 103.5,38.1 v103.5,40.32 103.5,43.18
S$88
  Top 0.305: 102.23,38.1 102.23,40.96 arc-90 102.87,41.59 106.05,41.59 | 106.05,41.59 106.68,41.59 arc-90 107.31,40.96 107.31,38.1 | 106.05,41.59 106.05,38.1
S$89  (via drill 1)
  Top 0.305: v121.6,11.43 E$160.P$1 107.95,11.43 arc90 107.31,10.79 107.31,7.25 arc45 107.5,6.8 108.4,5.9 arc-45 108.58,5.45 E$155.P$2
S$90  (via drill 1)
  Bottom 0.406: 116.84,19.05 E$159.P$2 107.95,19.68
  Bottom 0.61: v121.6,15.24 121.6,18.41 arc90 120.97,19.05 116.84,19.05
S$91
  Top 0.305: 106.05,8.89 E$155.P$1 E$156.P$2
S$92
  Top 0.305: 92.08,11.43 104.14,11.43 arc-90 104.78,10.79 104.78,8.89
S$93
  Top 0.305: E$152.P$1 92.08,8.26
S$94  (via drill 0.8)
  Top 0.305: 104.78,13.97 104.78,12.38 arc-90 104.46,12.06 95.25,12.06 arc-28 93.98,12.38 arc28 92.71,13.02 91.44,13.02 arc90 90.49,12.06 90.49,10.79 arc90 91.44,9.84 92.71,9.84 arc28 93.98,10.48 arc-28 95.25,10.79 101.92,10.79 arc-90 102.23,10.48 102.23,6.35 arc90 102.87,5.71 v104.78,5.71
  Bottom 0.305: 104.78,8.89 v104.78,5.71 E$148.P$2 101.6,3.81
S$95
  Top 0.305: 99.69,6.35 99.69,8.89 | E$156.P$1 99.69,6.35 | 100.97,8.89 100.97,6.99 arc-90 100.33,6.35 99.69,6.35
S$96
  Top 0.305: 100.97,13.97 E$153.P$1 E$154.P$2
S$97
  Top 0.305: 99.69,13.97 99.69,15.88 arc90 99.06,16.51 96.52,16.51 arc-90 95.89,17.14 E$154.P$1 E$151.P$1 92.08,14.61
S$98  (via drill 0.8)
  Top 0.406: 103.5,13.97 v103.5,16.19
  Bottom 0.305: 104.78,13.97 104.78,15.56 arc90 104.14,16.19 v103.5,16.19
  Bottom 0.406: 103.5,19.05 E$158.P$1 | 103.5,19.05 104.14,19.05 | 103.5,13.97 v103.5,16.19 103.5,19.05
S$99
  Top 0.305: 102.23,13.97 102.23,16.83 arc-90 102.87,17.46 106.05,17.46 | 106.05,17.46 106.68,17.46 arc-90 107.31,16.83 107.31,13.97 | 106.05,17.46 106.05,13.97
(copper drawn outside any net)
  shapes: Bottom circle x9, Top area x18

## Text on the board
tPlace: 732 | 910 | 732 | 910 | 732 | 910 | 0.1 | 0.1 | 0.1 | (10uH) | (10uH) | (10uH) | (0.1) | +5v | (0.1) | +5v | (0.1) | +5v | (0.1) | (0.1) | (0.1) | (10uF) | (10uF) | (10uF) | ADC | ADC | ADC | (2.5V) | 0.1 | (2.5V) | 0.1 | (2.5V) | 0.1 | wrappot | (LM4140) | TS925 | wrappot | (LM4140) | TS925 | wrappot | (LM4140) | TS925 | (100K) | (100K) | (100K) | (1uF) | (1uF) | (1uF) | wrappot | wrappot | wrappot | fix 1.0 | fix 1.0 | fix 1.0 | 1240 | 910 | 698 | 1240 | 910 | 698 | 1240 | 910 | 698 | 732 | 910 | 732 | 910 | 732 | 910 | 0.1 | 0.1 | 0.1 | (10uH) | (10uH) | (10uH) | (0.1) | +5v | (0.1) | +5v | (0.1) | +5v | (0.1) | (0.1) | (0.1) | (10uF) | (10uF) | (10uF) | ADC | ADC | ADC | (2.5V) | 0.1 | (2.5V) | 0.1 | (2.5V) | 0.1 | wrappot | TS925 | wrappot | TS925 | wrappot | TS925 | (LM4140) | (LM4140) | (LM4140) | (100K) | (100K) | (100K) | (1uF) | (1uF) | (1uF) | wrappot | wrappot | wrappot | fix 1.0 | fix 1.0 | fix 1.0 | 1240 | 910 | 698 | 1240 | 910 | 698 | 1240 | 910 | 698 | 732 | 910 | 732 | 910 | 732 | 910 | 0.1 | 0.1 | 0.1 | (10uH) | (10uH) | (10uH) | (0.1) | +5v | (0.1) | +5v | (0.1) | +5v | (0.1) | (0.1) | (0.1) | (10uF) | (10uF) | (10uF) | ADC | ADC | ADC | (2.5V) | 0.1 | (2.5V) | 0.1 | (2.5V) | 0.1 | wrappot | TS925 | wrappot | TS925 | wrappot | TS925 | (LM4140) | (LM4140) | (LM4140) | (100K) | (100K) | (100K) | (1uF) | (1uF) | (1uF) | wrappot | wrappot | wrappot | fix 1.0 | fix 1.0 | fix 1.0 | 1240 | 910 | 698 | 1240 | 910 | 698 | 1240 | 910 | 698